# Altium PCB layout.PcbDoc
Units mm, origin at the board's own origin, x right, y up, seen from the top; angles counter-clockwise.
Board outline 78.98 x 56.03 mm, 2 copper layers (Top Layer, Bottom Layer); 74 components, 75 nets, 270 pads, 38 vias.
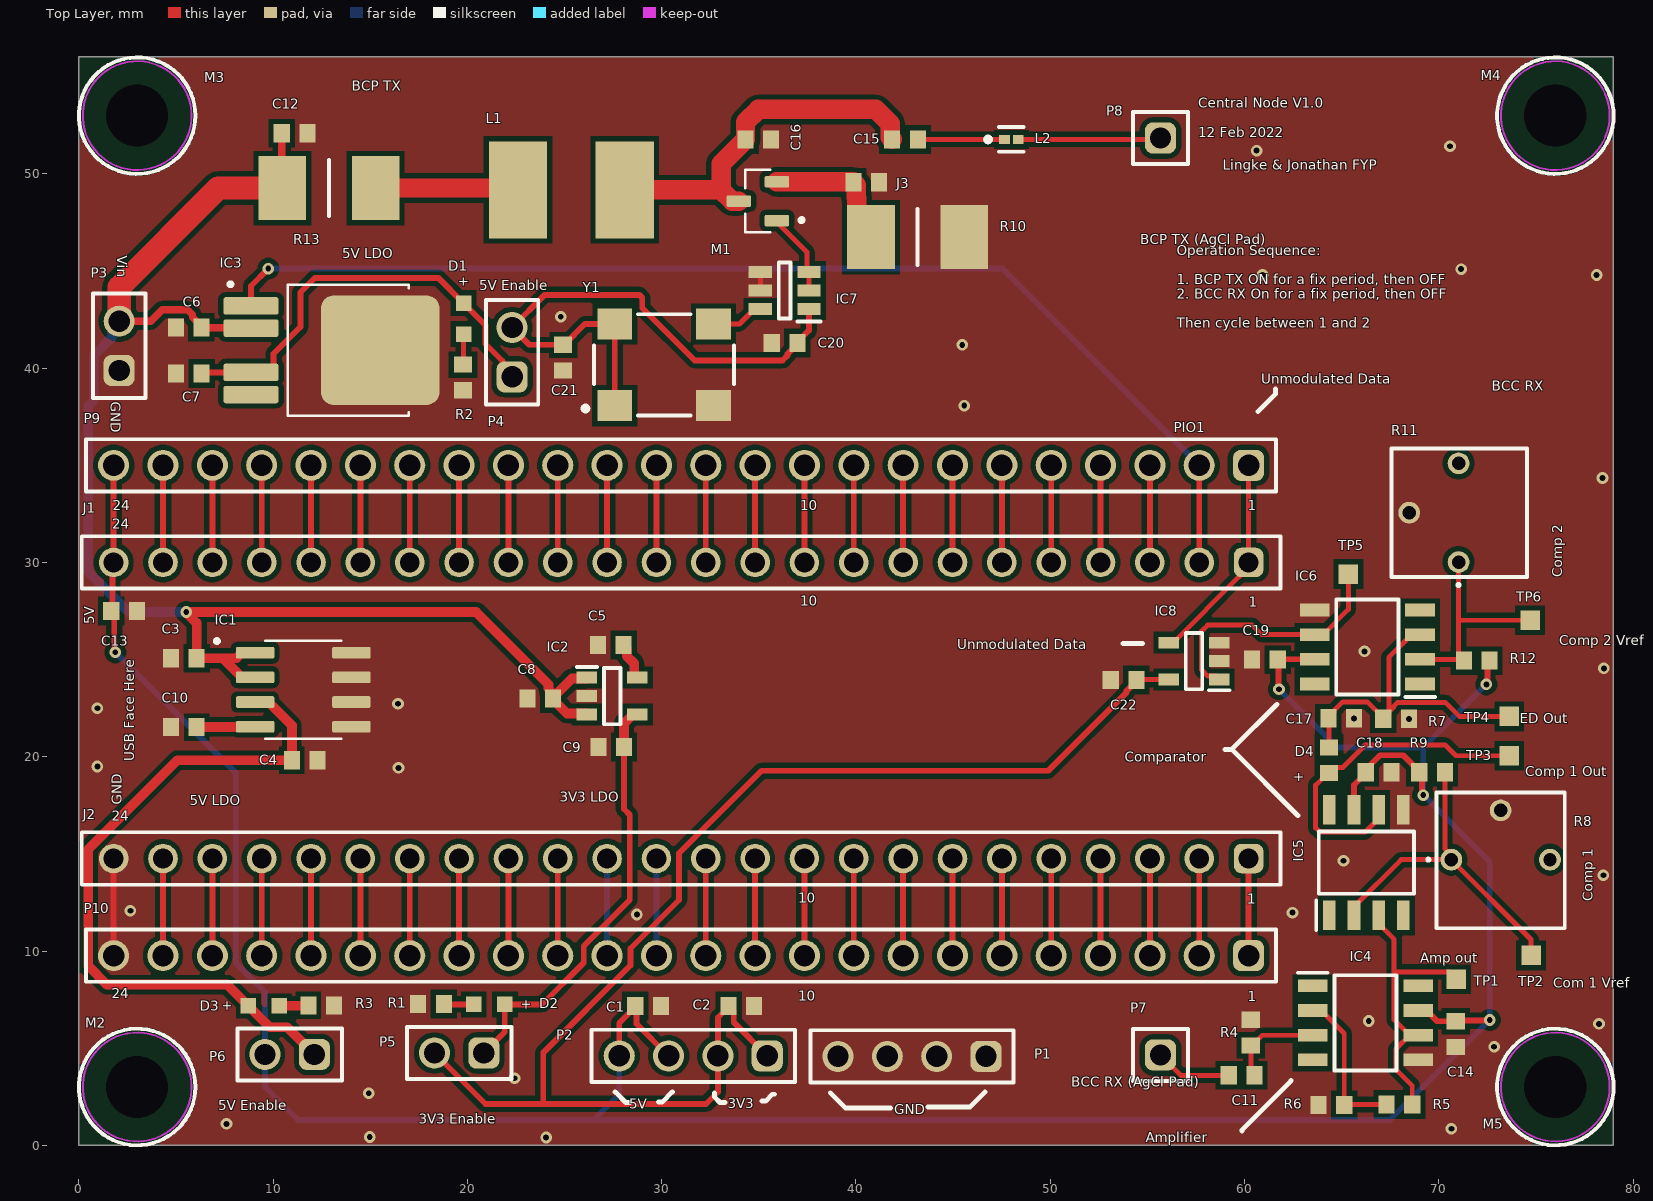
[diagram p0: Top Layer view]
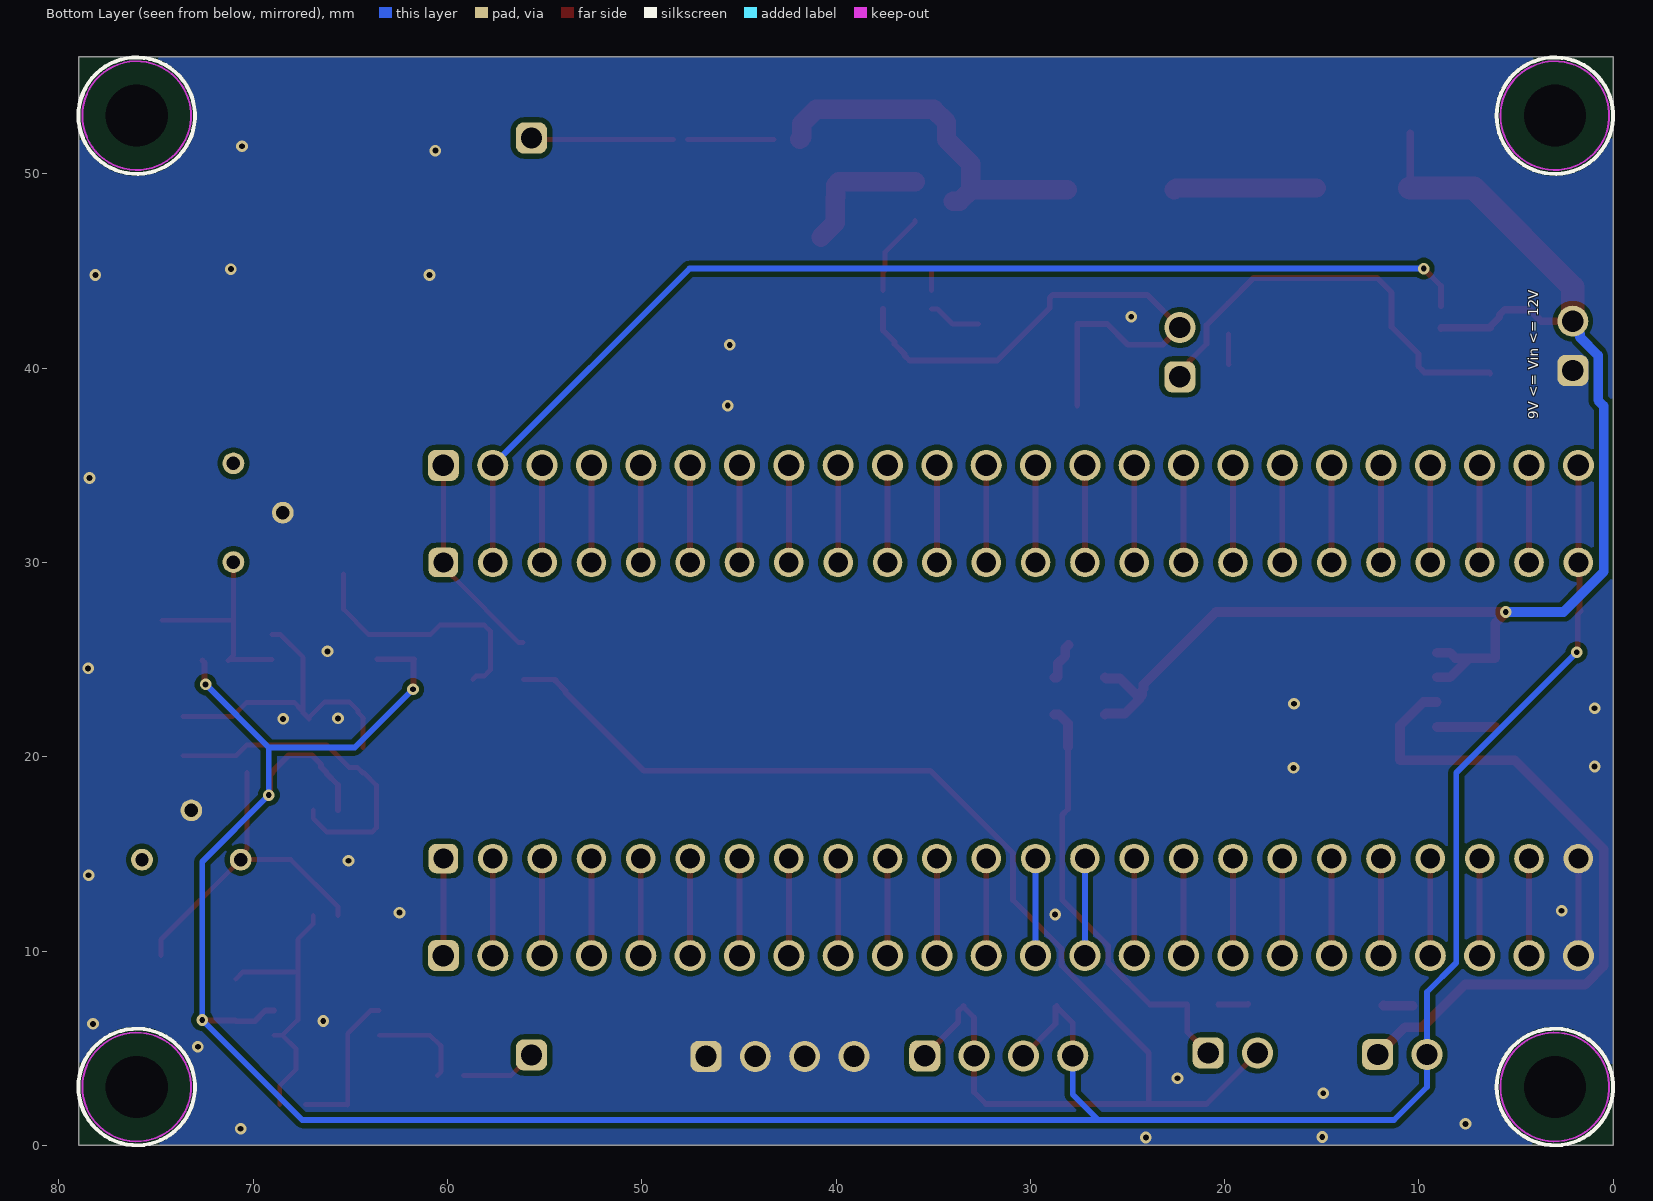
[diagram p1: Bottom Layer view, seen from below]
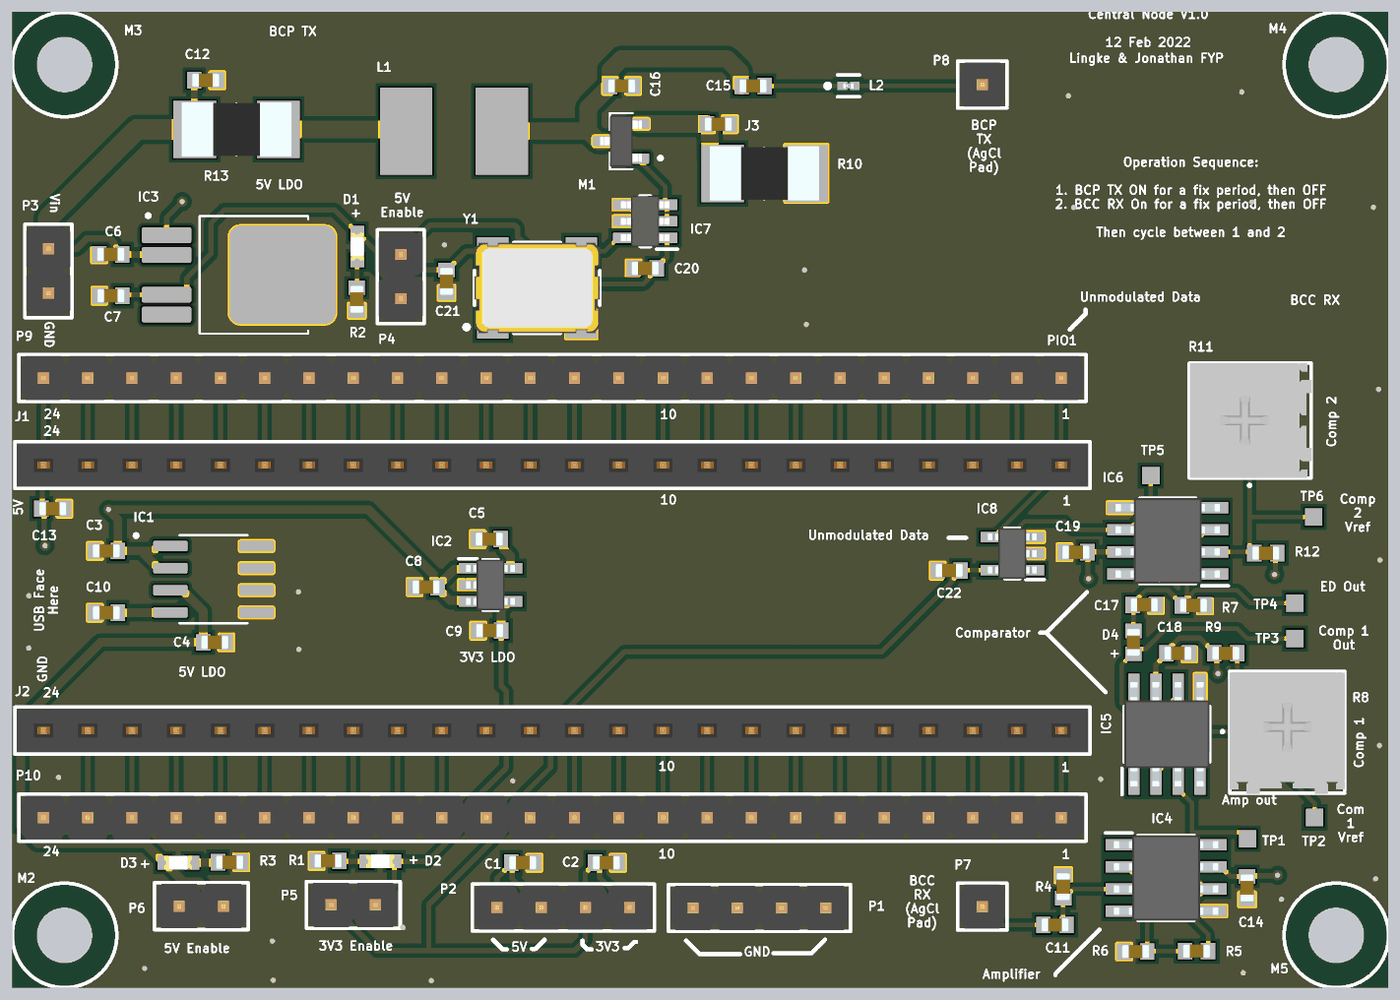
[diagram p2: 3D render of the assembled board from above, using the file's embedded part models]

## Layer stack, top to bottom
Top Solder: solder mask 0.0102, Solder Resist, Dk 3.5
Top Layer: signal copper 0.0356
Dielectric 1: dielectric 0.32, FR-4, Dk 4.8
Bottom Layer: signal copper 0.0356
Bottom Solder: solder mask 0.0102, Solder Resist, Dk 3.5

## Board outline
0,56.025 78.975,56.025 78.975,0 0,0

## Design rules (kind name [scope] priority, off if disabled: settings)
Clearance [All] p1: gap=0.254 ignorepadtopadclearanceinfootprint=TRUE
HoleSize [All] p1: absolutevalues=TRUE maxlimit=10 minlimit=0.025 maxpercent=80.000 minpercent=20.000
HoleToHoleClearance [All] p1: gap=0.1 allowstackedmicrovias=TRUE
MinimumSolderMaskSliver [All] p1: minsoldermaskwidth=0.1
PlaneConnect [All] p1: planeconnectstyle=Direct reliefexpansion=0.508 reliefentries=4 reliefconductorwidth=0.254 reliefairgap=0.254
PolygonConnect [All] p1: connectstyle=Direct reliefconductorwidth=0.254 reliefentries=4 polygonreliefangle="90 Angle" airgapwidth=0.254
RoutingVias [All] p1: holewidth=0.711 width=1.27 viastyle="Through Hole" minholewidth=0.3 minwidth=0.6 maxholewidth=0.711 maxwidth=1.27
SilkToSilkClearance [All] p1: silktosilkclearance=0.1
SilkToSolderMaskClearance [IsPad] p1: minsilkscreentomaskgap=0.1 clearancetoexposedcopper=TRUE
SolderMaskExpansion [All] p1: expansion=0.102 istentingtop=FALSE
Width Width_1 [InNet('Vin')] p1: maxlimit=5 minlimit=0.254 preferedwidth=0.5
Width [All] p2: maxlimit=10 minlimit=0.254 preferedwidth=0.254
24 further rules are at their usual default settings.

## Components (designator, comment, footprint, x,y, rotation, side; value= is the part's Value field where it differs from the comment)
C1 "0.1uF" 0603 29.3,7.175 r0 top
C2 "0.1uF" 0603 34.1,7.175 r0 top
C3 "0.33uF" 0603 5.4,25.075 r180 top
C4 "10uF" 0603 11.625,19.825 r0 top
C5 "10nF" 0603 27.375,25.749 r180 top
C6 "0.33uF" 0603 5.65,42.1 r0 top
C7 "10uF" 0603 5.661,39.725 r0 top
C8 "0.33uF" 0603 23.75,23 r180 top
C9 "10uF" 0603 27.4,20.501 r180 top
C10 "10nF" 0603 5.4,21.525 r180 top
C11 "33pF" 0603 59.85,3.6 r0 top
C12 "10uF" 0603 11.1,52.1 r0 top
C13 "0.1uF" 0603 2.325,27.5 r180 top
C14 "0.1uF" 0603 70.874,5.725 r90 top
C15 "91pF" 0603 42.525,51.775 r0 top
C16 "4.7pF" 0603 34.975,51.775 r0 top
C17 "50pF" 0603 64.975,21.975 r180 top
C18 "0.1uF" 0603 66.9,19.199 r180 top
C19 "0.1uF" 0603 61.05,25 r0 top
C20 "10uF" 0603 36.325,41.3 r180 top
C21 "0.1uF" 0603 24.925,40.55 r270 top
C22 "0.1uF" 0603 53.775,23.95 r0 top
D1 "Super Red, 1.9V" WL-SMCW_0603_H=0.7mm 19.8,42.55 r90 top
D2 "Super Red, 1.9V" WL-SMCW_0603_H=0.7mm 21.125,7.25 r0 top
D3 "Super Red, 1.9V" WL-SMCW_0603_H=0.7mm 9.525,7.175 r180 top
D4 "Diode" 0603 64.35,19.825 r90 top
IC1 "LDO 5V" SOIC-8 11.55,23.45 r0 top
IC2 "LDO 3V3" SOT-23-5 27.45,23.125 r0 top
IC3 "LD29150PT50R" PPAK 13,40.925 r270 top
IC4 "LTC6268IS8#PBF" SOIC127P599X175-8N 66.225,6.3 r0 top
IC5 "LTC6268IS8#PBF" SOIC127P599X175-8N 66.275,14.55 r90 top
IC6 "LTC6268IS8#PBF" SOIC127P599X175-8N 66.325,25.651 r180 top
IC7 "LM5114B" SOT-23-6 36.329,44 r180 top
IC8 "SN74LV1T32DBVRG4" SOT-23-5 57.4,24.925 r180 top
J1 "61302411821" 61302411821 31,30 r180 top
J2 "61302411821" 61302411821 31,14.76 r180 top
J3 "Jumper" 0603 40.525,49.575 r180 top
L1 "TPI078060L047N" TPI078060L047N 28.1,49.175 r180 top
L2 "LQP03TN75NH02D" FP-LQP03PN_02-IPC_A 48,51.775 r0 top
M1 "IRLML0040TRPBF" SOT-23 34.95,48.599 r270 top
M2 "M3 Mounting Hole" "M3 Hole" 3,3 r0 top
M3 "M3 Mounting Hole" "M3 Hole" 3,53 r0 top
M4 "M3 Mounting Hole" "M3 Hole" 76,53 r0 top
M5 "M3 Mounting Hole" "M3 Hole" 76,3 r0 top
P1 "61300411121" 61300411121 42.885,4.575 r180 top
P2 "61300411121" 61300411121 31.625,4.6 r180 top
P3 "61300211121" 61300211121 2.075,41.15 r90 top
P4 "61300211121" 61300211121 22.299,40.825 r90 top
P5 "61300211121" 61300211121 19.575,4.751 r180 top
P6 "61300211121" 61300211121 10.85,4.676 r180 top
P7 "61300111121" 61300111121 55.675,4.65 r0 top
P8 "61300111121" 61300111121 55.675,51.85 r0 top
P9 "61302411121" 61302411121 31,35 r180 top
P10 "61302411121" 61302411121 31,9.76 r180 top
R1 "1K Ohm" 0603 18.125,7.275 r0 top
R2 "1K Ohm" 0603 19.775,39.525 r90 top
R3 "1K Ohm" 0603 12.475,7.2 r180 top
R4 "33K Ohm" 0603 60.325,5.8 r270 top
R5 "100k Ohm" 0603 67.975,2.1 r180 top
R6 "1k Ohm" 0603 64.475,2.075 r0 top
R7 "25K Ohm" 0603 67.8,21.95 r180 top
R8 "3362P-1-303LF" 3362P_1 73.185,11.17 r0 top
R9 "10k Ohm" 0603 69.654,19.199 r0 top
R10 "Resistor_2512" 2512 43.175,46.75 r180 top
R11 "3362P-1-303LF" 3362P_1 74.55,32.562 r90 top
R12 "10k Ohm" 0603 71.95,24.95 r0 top
R13 "10 Ohm" 2512 12.875,49.275 r180 top
TP1 "TP" "Test Point" 70.9,8.55 r0 top
TP2 "TP" "Test Point" 74.75,9.775 r0 top
TP3 "TP" "Test Point" 73.625,20.05 r0 top
TP4 "TP" "Test Point" 73.625,22.075 r0 top
TP5 "TP" "Test Point" 65.35,29.4 r0 top
TP6 "TP" "Test Point" 74.7,27.025 r0 top
Y1 "40MHz, 5V" WE-SPXO_CFPS-72 30.124,40.175 r0 top

## Footprints (in the part's own frame and the unit in brackets; to place one, negate y for a bottom-side part, rotate by r counter-clockwise, add the part's x,y. Pads: shape width x height; smd on the part's side, far side on the other; paste and mask are expansions set on the pad)
0603 [mm]
  rect 0.83x0.94 smd: 1(-0.66,0) 2(0.66,0)
  body extent -0.8,-0.4 0.8,0.4, height 0.9
2512 [mm]
  rect 2.45x3.3 smd: 1(-2.4,0) 2(2.4,0)
  silkscreen extent 0,-1.45 0,1.45, body extent -3.15,-1.55 3.15,1.55, height 0.8
3362P_1 [mm]
  round 1.12 hole 0.69: 1(-2.54,3.53) 2(0,6.07) 3(2.54,3.53)
  silkscreen extent -3.78,0 3.3,6.99, body extent -3.3,-0.04 3.3,6.95, height 4.75
61300111121 [mm] "Pin Header, pitch 2.54 mm, THT, Vertical, single row, 1p"
  rrect50% 1.6x1.6 hole 1.1: 1(0,0)
  silkscreen extent -1.42,-1.35 1.42,1.35, body extent -1.27,-1.27 1.27,1.27, height 8.57
61300211121 [mm] "Pin Header, pitch 2.54 mm, THT, Vertical, single row, 2p"
  rrect50% 1.6x1.6 hole 1.1: 1(-1.27,0)
  round 1.6 hole 1.1: 2(1.27,0)
  silkscreen extent -2.69,-1.35 2.69,1.35, body extent -2.54,-1.27 2.54,1.27, height 8.57
61300411121 [mm] "Pin Header, pitch 2.54 mm, THT, Vertical, single row, 4p"
  rrect50% 1.6x1.6 hole 1.1: 1(-3.81,0)
  round 1.6 hole 1.1: 2(-1.27,0) 3(1.27,0) 4(3.81,0)
  silkscreen extent -5.23,-1.35 5.23,1.35, body extent -5.08,-1.27 5.08,1.27, height 8.57
61302411121 [mm] "Pin Header, pitch 2.54 mm, THT, Vertical, single row, 24p"
  rrect50% 1.6x1.6 hole 1.1: 1(-29.21,0)
  round 1.6 hole 1.1: 2(-26.67,0) 3(-24.13,0) 4(-21.59,0) 5(-19.05,0) 6(-16.51,0) 7(-13.97,0) 8(-11.43,0) 9(-8.89,0) 10(-6.35,0) 11(-3.81,0) 12(-1.27,0) 13(1.27,0) 14(3.81,0) 15(6.35,0) 16(8.89,0) 17(11.43,0) 18(13.97,0) 19(16.51,0) 20(19.05,0) 21(21.59,0) 22(24.13,0) 23(26.67,0) 24(29.21,0)
  silkscreen extent -30.63,-1.35 30.63,1.35, body extent -30.48,-1.27 30.48,1.27, height 8.57
61302411821 [mm] "Socket Header, Pitch 2.54 mm, THT, Vertical, single row, 24p"
  rrect50% 1.52x1.52 hole 1.02: 1(-29.21,0)
  round 1.52 hole 1.02: 2(-26.67,0) 3(-24.13,0) 4(-21.59,0) 5(-19.05,0) 6(-16.51,0) 7(-13.97,0) 8(-11.43,0) 9(-8.89,0) 10(-6.35,0) 11(-3.81,0) 12(-1.27,0) 13(1.27,0) 14(3.81,0) 15(6.35,0) 16(8.89,0) 17(11.43,0) 18(13.97,0) 19(16.51,0) 20(19.05,0) 21(21.59,0) 22(24.13,0) 23(26.67,0) 24(29.21,0)
  silkscreen extent -30.86,-1.35 30.86,1.35, body extent -30.73,-1.25 30.73,1.25, height 8.55
FP-LQP03PN_02-IPC_A [mm]
  rect 0.554x0.463 smd paste+0 mask+0: 1(-0.354,0) 2(0.354,0)
  silkscreen extent -1.32,-0.63 0.63,0.63, body extent -0.83,-0.43 0.83,0.43, height 0.25
"M3 Hole" [mm]
  round 0 hole 3.2 unplated mask+0.1: 1(0,0)
  Keep-Out Layer circle w0.1: c0,0 r2.8
  silkscreen extent -3,-3 3,3
PPAK [mm]
  rrect23% 0.9x2.83 smd mask+0.13: 1(-2.28,-4.14) 2(-1.14,-4.14) 4(1.14,-4.14) 5(2.28,-4.14)
  rrect23% 5.63x6.1 smd: 6(0,2.51)
  silkscreen extent -3.5,-5.3 3.37,3.98
SOIC127P599X175-8N [mm]
  rect 1.526x0.65 smd: 1(-2.712,1.905) 2(-2.712,0.635) 3(-2.712,-0.635) 4(-2.712,-1.905) 5(2.712,-1.905) 6(2.712,-0.635) 7(2.712,0.635) 8(2.712,1.905)
  silkscreen extent -3.47,-2.45 1.6,2.58, body extent -3,-2.45 3,2.45, height 1.75
SOIC-8 [mm]
  rrect25% 1.97x0.6 smd: 1(-2.475,1.905) 2(-2.475,0.635) 3(-2.475,-0.635) 4(-2.475,-1.905) 5(2.475,-1.905) 6(2.475,-0.635) 7(2.475,0.635) 8(2.475,1.905)
  silkscreen extent -4.54,-2.52 1.95,2.6
SOT-23 [mm]
  rrect25% 0.59x1.26 smd: 1(1,0.98) 2(-1,0.98) 3(0,-0.98)
  silkscreen extent -1.61,-0.65 1.61,2.35, body extent -1.46,-1.2 1.46,1.2, height 1.2
SOT-23-5 [mm]
  rect 1.05x0.6 smd: 1(-1.3,0.95) 2(-1.3,0) 3(-1.3,-0.95) 4(1.3,-0.95) 5(1.3,0.95)
  silkscreen extent -1.83,-1.45 0.43,1.5, body extent -1.4,-1.45 1.4,1.45, height 1
SOT-23-6 [mm]
  rect 1.2x0.6 smd: 1(-1.25,0.95) 2(-1.25,0) 3(-1.25,-0.95) 4(1.25,-0.95) 5(1.25,0) 6(1.25,0.95)
  silkscreen extent -1.85,-1.45 0.3,1.6, body extent -1.4,-1.45 1.4,1.45, height 1.2
"Test Point" [mm]
  rect 1x1 smd: 1(0,0)
TPI078060L047N [mm]
  rect 3x5 smd: 1(0,0) 2(5.5,0)
WE-SPXO_CFPS-72 [mm] "Simple Packaged Quartz Oscillator, body 7.2x5.2mm"
  rect 1.8x1.6 smd: 1(-2.54,-2.1) 2(2.54,-2.1) 3(2.54,2.1) 4(-2.54,2.1)
  silkscreen extent -4.17,-2.6 3.6,2.6, body extent -3.6,-2.6 3.6,2.6, height 1.35
WL-SMCW_0603_H=0.7mm [mm] "SMD Mono-color Chip LED, body 1.6x0.8mm"
  rect 0.8x0.8 smd: 1(-0.8,0) 2(0.8,0)
  body extent -0.8,-0.4 0.8,0.4, height 0.7

## Part data
C1 C2 C3 C4 C5 C6 C7 C8 C9 C10 C11 C12 C13 C14 C15 C16 C17 C18 C19 C20 C21 C22: library part Capacitor_0603, "Capacitor"
D1 D2 D3: library part 150060SS75000, "WL-SMCW SMT Mono-color Chip LED Waterclear, size 0603, Super Red, 1.9V, 140deg", Emitting Color="Super Red", Forward Voltage typ.=1.9V, Operating Temperature="-40 to +85degC", Chip Technology=AlInGaP, ComponentLink1Description=Manufacturer, ComponentLink1URL=http://www.we-online.de, ComponentLink2Description=Datasheet, ComponentLink2URL=https://www.we-online.com/catalog/datasheet/150060SS75000.pdf, Dominant Wavelength typ.=630nm, Luminous Intensity typ.=60mcd, Mounting Technology=SMT, Packaging="Tape and Reel", Part Number=150060SS75000, Peak Wavelength typ.=645nm, Published Date="December 2019", Publisher="Wurth Elektronik", Size=0603, Viewing Angle=140deg
IC1: library part SPX3819S-L-5-0/TR
IC2: library part SPX3819M5-L-3-3/TR
IC3: "1.5A, Very-Low Drop Voltage Regulator, 5V, 5-Pin PPAK", ComponentLink1Description="Manufacturer URL", ComponentLink1URL=http://www.st.com, ComponentLink2Description=Datasheet, ComponentLink2URL=http://www.st.com/internet/com/TECHNICAL_RESOURCES/TECHNICAL_LITERATURE/DATASHEET/CD00003403.pdf, DatasheetVersion=27/10/2010, PackageDescription="5-Pin Transistor Outline Package 1.27 mm Pitch, 9.7 mm Lead Span", PackageReference=PPAK, PackageVersion=1/06/2004
IC4 IC5 IC6: "Integrated Circuit", Manufacturer_Name="Linear Technology", Mouser2 Part Number=584-LTC6268IS8#PBF, Datasheet Link=https://componentsearchengine.com//LTC6268IS8#PBF.pdf, Height=1.752mm, Manufacturer_Part_Number=LTC6268IS8#PBF, Mouser2 Price/Stock=https://www.mouser.com/Search/Refine.aspx?Keyword=584-LTC6268IS8%23PBF
IC8: Supplier Part Number 1=595-SN74LV1T32DBVRG4, Supplier 1=Mouser
J1 J2: "WR-PHD Socket Header, THT, pitch 2.54mm, Single Row, Vertical, 24p", Contact Resistance=20mOhm, Manufacturer="Wurth Elektronik", Operating Temperature="-40 to +125degC", Rated Current=3A, Withstanding Voltage=500VAC, Working Voltage=250VAC, ComponentLink1Description=Manufacturer, ComponentLink1URL=http://www.we-online.de, ComponentLink2Description=Datasheet, ComponentLink2URL=https://www.we-online.com/catalog/datasheet/61302411821.pdf, Gender="Socket Header", Manufacturer Part Number=61302411821, Mounting Technology=THT, Orientation=Vertical, Packaging=Tray, Pin Number=24, Pitch=2.54mm, Row Number=Single
J3: library part 0603_Jumper, "Capacitor"
L1: Supplier Part Number 1=399-TPI078060L047NCT-ND, Supplier 1=Digi-Key
L2: "Film type RF Inductor 75nH ±3% 100mA 10Ω 0201 (0603)", Case Code (Imperial)=0201, Case Code (Metric)=0603, Current Rating=100mA, DC Resistance (DCR)=10R, Inductance=75nH, Max Operating Temperature=125°C, Min Operating Temperature=-55°C, Package Quantity=15000, Resistor Type="Thin Film", Self Resonant Frequency=1GHz, Supplier Part Number 1=490-13018-1-ND, Test Frequency=300MHz, Tolerance=3%, Case/Package=0201, Core Material=Non-Magnetic, Height=0.3mm, Height - Seated (Max)=0.013inch, Length=0.024inch, Max DC Current=100mA, Mount="Surface Mount", Packaging="Tape and Reel", Q Factor=8, RoHS Compliant=Yes, Shielding=Unshielded, Supplier 1=Digi-Key, Termination=SMD/SMT, Weight=6E-06oz, Width=0.012inch
M1: "HEXFET(R) Power MOSFET, 40 V, -55 to 150 degC, 3-Pin SOT-23, RoHS, Tape and Reel", Manufacturer="International Rectifier", Maximum Continuous Drain Current=3.6A, Maximum Drain Source Resistance=0.056Ω, Maximum Drain Source Voltage=40V, Maximum Gate Source Voltage=±16V, Maximum Gate Threshold Voltage=2.5V, Maximum Operating Temperature=+150°C, Maximum Power Dissipation=1.3W, Minimum Gate Threshold Voltage=1V, Minimum Operating Temperature=-55°C, Package Description="3-Pin Small Outline Transistor, Body 2.92 x 1.3 mm, Pitch 0.95 mm", Package Reference=SOT-23, Typical Input Capacitance @ Vds=266pF@25V, Category=PowerMOSFET, Channel Mode=Enhancement, Channel Type=N, Datasheet URL=https://datasheet.ciiva.com/22709/irlml0040pbf-22709201.pdf, Datasheet Version=02/2012, Dimensions=3.04x1.4x1.02mm, Height=1.02mm, Length=3.04mm, Manufacturer URL=http://internationalrectifier.com/, Mounting Technology=SurfaceMount, Mounting Type=SurfaceMount, Number of Elements per Chip=1, Package Type=SOT-23, Pin Count=3, Transistor Configuration=Single, Transistor Material=Si, Typical Gate Charge @ Vgs=2.6nC@4.5V, Typical Turn-Off Delay Time=6.4ns, Typical Turn-On Delay Time=5.1ns, Width=1.4mm
M2 M3 M4 M5: library part M3_Mounting_hole
P1 P2: "WR-PHD Pin Header, THT, pitch 2.54mm, Single Row, Vertical, 4p", Contact Resistance=20mOhm, Manufacturer="Wurth Elektronik", Operating Temperature="-40 to +105degC", Rated Current=3A, Withstanding Voltage=500VAC, Working Voltage=250VAC, ComponentLink1Description=Manufacturer, ComponentLink1URL=http://www.we-online.de, ComponentLink2Description=Datasheet, ComponentLink2URL=https://www.we-online.com/catalog/datasheet/61300411121.pdf, Gender="Pin Header", Manufacturer Part Number=61300411121, Mounting Technology=THT, Orientation=Vertical, Packaging=Bag, Pin Number=4, Pitch=2.54mm, Row Number=Single
P3 P4 P5 P6: "WR-PHD Pin Header, THT, pitch 2.54mm, Single Row, Vertical, 2p", Contact Resistance=20mOhm, Manufacturer="Wurth Elektronik", Operating Temperature="-40 to +105degC", Rated Current=3A, Withstanding Voltage=500VAC, Working Voltage=250VAC, ComponentLink1Description=Manufacturer, ComponentLink1URL=http://www.we-online.de, ComponentLink2Description=Datasheet, ComponentLink2URL=https://www.we-online.com/catalog/datasheet/61300211121.pdf, Gender="Pin Header", Manufacturer Part Number=61300211121, Mounting Technology=THT, Orientation=Vertical, Packaging=Bag, Pin Number=2, Pitch=2.54mm, Row Number=Single
P7 P8: "WR-PHD Pin Header, THT, pitch 2.54mm, Single Row, Vertical, 1p", Contact Resistance=20mOhm, Manufacturer="Wurth Elektronik", Operating Temperature="-40 to +105degC", Rated Current=3A, Withstanding Voltage=500VAC, Working Voltage=250VAC, ComponentLink1Description=Manufacturer, ComponentLink1URL=http://www.we-online.de, ComponentLink2Description=Datasheet, ComponentLink2URL=https://www.we-online.com/catalog/datasheet/61300111121.pdf, Gender="Pin Header", Manufacturer Part Number=61300111121, Mounting Technology=THT, Orientation=Vertical, Packaging=Bag, Pin Number=1, Pitch=2.54mm, Row Number=Single
P9 P10: "WR-PHD Pin Header, THT, pitch 2.54mm, Single Row, Vertical, 24p", Contact Resistance=20mOhm, Manufacturer="Wurth Elektronik", Operating Temperature="-40 to +105degC", Rated Current=3A, Withstanding Voltage=500VAC, Working Voltage=250VAC, ComponentLink1Description=Manufacturer, ComponentLink1URL=http://www.we-online.de, ComponentLink2Description=Datasheet, ComponentLink2URL=https://www.we-online.com/catalog/datasheet/61302411121.pdf, Gender="Pin Header", Manufacturer Part Number=61302411121, Mounting Technology=THT, Orientation=Vertical, Packaging=Bag, Pin Number=24, Pitch=2.54mm, Row Number=Single
R1 R2 R3 R4 R5 R6 R7 R9 R12: library part Resistor, "Resistor"
R8 R11: "Resistor", Manufacturer_Name=Bourns, Manufacturer_Part_Number=3362P-1-303LF
R10: "Resistor"
R13: library part Resistor_2512, "Resistor"
TP1 TP2 TP3 TP4 TP5 TP6: library part "Test Point", "Test Point 1mm by 1mm"
Y1: library part 831018739, "WE-SPXO Simple Packaged Quartz Oscillator, SMT, CFPS-72, 40MHz, 5V", Frequency=40MHz, Frequency Stability=+/-50ppm, Manufacturer="Wurth Elektronik", Operating Temperature="0 to +70degC", Supply Voltage=5V, ComponentLink1Description=Manufacturer, ComponentLink1URL=http://www.we-online.de, ComponentLink2Description=Datasheet, ComponentLink2URL=https://katalog.we-online.com/pbs/datasheet/831018739.pdf, Manufacturer Part Number=831018739, Mounting Technology=SMT, Packaging="Tape and Reel", Published Date="July 2020", Size=CFPS-72

## Via types
v1: diameter 0.6, hole 0.3, Top Layer to Bottom Layer, 38 vias

## Nets (pads, with @x,y where several pads share a name; then routed paths per layer and width w, separated by ;. In a path a pad name is that pad's centre, name@x,y a point inside that pad or via, vN(x,y) a via of type N, cw(c..) or ccw(c..) an arc to the next point about the centre after c; other vN are vias at no path point)
"AFE Output": IC6.6 IC8.1 TP5.1 | length 13.3
  Top Layer w0.254: IC8.1 58.527,24.148 58.113,24.148 57.794,24.467 57.794,26.469 58.1,26.775 60.393,26.775 60.882,26.286 IC6.6 64.051,26.286 65.35,27.585 TP5.1
Amp_out: IC4.6 IC5.3 R5.1 TP1.1 | length 14.8
  Top Layer w0.254: IC5.3 66.91,11.4 67.705,10.605 67.705,8.925 ; R5.1 68.635,3.07 67.793,3.912 67.793,4.959 IC4.6@68.499,5.665 ; IC4.6 IC4.6@68.499,5.665 ; TP1.1 70.527,8.923 67.707,8.923 67.705,8.925 ; 67.705,8.925 67.705,6.459 IC4.6@68.499,5.665
"BCC RX 3V3": C2.1 C22.2 IC8.5 P2.1 P2.2 P5.2 | length 68.8
  Top Layer w0.254: C22.2 54.46,23.975 IC8.5
  Top Layer w0.3: P5.2 20.931,2.125 23.9,2.125 ; P2.1 33.705,6.33 33.705,6.91 C2.1 33.44,7.12 32.895,6.575 P2.2 32.895,2.745 32.275,2.125 23.9,2.125 ; C22.2 54.435,23.895 53.934,23.394 53.934,23.313 49.899,19.277 35.141,19.277 30.894,15.03 30.894,12.627 28.394,10.127 28.394,9.261 23.9,4.767 23.9,2.125
"BCC RX 5V": C1.1 C13.2 C14.2 C18.2 C19.2 IC4.7 IC5.7 IC6.7 J1.24 P2.3 P2.4 P6.2 P9.24 R9.1 R12.2 | length 155.7
  Top Layer w0.3: P9.24 J1.24 1.727,29.938 1.727,27.563 C13.2 1.818,27.347 1.818,25.432 v1(1.875,25.375) ; P2.4 27.815,6.295 28.64,7.12 C1.1 28.7,7.115 28.7,6.255 P2.3 ; v1(61.775,23.475) 61.743,23.507 61.743,24.968 C19.2 61.726,25.016 IC6.7 ; IC5.7 65.64,18.544 66.24,19.144 C18.2 66.505,19.464 66.505,19.601 66.978,20.073 68.175,20.073 68.994,19.254 R9.1 69.143,19.051 69.143,18.082 v1(69.2,18.025) ; IC4.7 69.375,6.935 69.925,6.385 C14.2 70.907,6.418 72.593,6.418 v1(72.625,6.45) ; v1(72.45,23.725) 72.507,23.782 72.507,24.847 R12.2
  Bottom Layer w0.3: v1(1.875,25.375) 8.074,19.176 8.074,9.393 9.58,7.887 P6.2 9.58,2.995 11.275,1.3 26.5,1.3 ; P2.4 27.815,2.615 26.5,1.3 ; v1(61.775,23.475) 64.775,20.475 69.2,20.475 ; v1(72.45,23.725) 69.2,20.475 ; 26.5,1.3 67.475,1.3 v1(72.625,6.45) 72.625,14.6 v1(69.2,18.025) 69.2,20.475
"BCP TX 5V": C20.1 C21.1 IC7.1 P4.2 Y1.1 Y1.4 | length 29.8
  Top Layer w0.3: Y1.1 Y1.4 26.045,42.275 24.98,41.21 C21.1 23.184,41.21 P4.2 23.979,43.775 28.851,43.775 29,43.626 29,43.099 31.699,40.4 36.221,40.4 36.484,40.663 36.484,40.744 36.985,41.245 36.985,41.355 37.579,41.949 IC7.1
"BCP TX Vout": L2.2 P8.1 | length 7.4
  Top Layer w0.254: L2.2 55.6,51.775 P8.1
"Comparator 1 out": D4.1 IC5.6 TP3.1 | length 17.3
  Top Layer w0.254: IC5.6 66.91,16.824 66.204,16.118 63.887,16.118 63.664,16.341 63.664,18.534 64.295,19.165 D4.1 64.638,19.453 65.07,19.453 66.221,20.604 70.333,20.604 70.887,20.05 TP3.1
"Comparator 1 Vref": IC5.2 R8.1 R9.2 TP2.1 | length 17.7
  Top Layer w0.254: IC5.2 65.64,12.276 68.064,14.7 R8.1 ; R9.2 70.314,15.265 70.645,14.934 R8.1 ; TP2.1 74.75,10.595 R8.1
"Comparator 2 Vref": IC6.2 R11.1 R12.1 TP6.1 | length 11.1
  Top Layer w0.254: IC6.2 R12.1@71.224,25.016 ; R11.1 71.02,27.075 ; R12.1 R12.1@71.224,25.016 ; TP6.1 71.07,27.025 71.02,27.075 ; 71.02,27.075 71.02,25.22 R12.1@71.224,25.016
"ED Out": C17.2 D4.2 IC6.3 R7.2 TP4.1 | length 17.7
  Top Layer w0.254: D4.2 64.35,21.94 C17.2 64.603,22.263 64.603,22.367 65.062,22.826 66.319,22.826 R7.2@67.14,22.005 ; IC6.3 68.599,26.286 67.428,25.115 67.428,22.238 R7.2 ; TP4.1 71.058,22.075 70.332,22.801 67.887,22.801 67.664,22.578 67.664,22.529 R7.2@67.14,22.005 ; R7.2 R7.2@67.14,22.005 ; R7.2 R7.2@67.14,22.005
FPGA_Enable: IC3.1 J1.2 P9.2 | length 59.4
  Top Layer w0.3: IC3.1 8.86,44.235 v1(9.75,45.125) ; J1.2 P9.2
  Bottom Layer w0.3: v1(9.75,45.125) 47.545,45.125 P9.2
GND: C1.2 C2.2 C3.2 C4.2 C5.2 C6.1 C7.1 C8.2 C9.2 C10.2 C12.2 C13.1 C14.1 C16.2 C17.1 C18.1 C19.1 C20.2 C21.2 C22.1 IC1.5 IC1.6 IC1.7 IC1.8 IC2.2 IC3.6 IC4.5 IC5.5 IC6.5 IC7.4 IC7.5 IC8.2 IC8.3 J2.24 J3.1 P1.1 P1.2 P1.3 P1.4 P3.1 P10.24 R1.1 R2.1 R3.1 R4.1 R6.1 R7.1 R8.2 R10.1 R11.2 Y1.2 | length 6
  Top Layer w0.254: IC7.5 IC7.4
  Top Layer w0.3: P10.24 J2.24
  other v1: 24.05,0.4 14.975,0.425 70.65,0.85 7.6,1.1 14.925,2.675 22.425,3.45 72.85,5.075 78.25,6.25 66.4,6.4 28.725,11.875 62.475,11.975 2.65,12.075 78.475,13.9 65.1,14.65 16.45,19.425 0.95,19.5 68.46,21.95 65.635,21.975 0.95,22.5 16.425,22.725 78.5,24.55 66.175,25.425 78.425,34.35 45.575,38.075 45.475,41.2 24.8,42.65 60.925,44.8 78.125,44.8 71.15,45.1 60.625,51.2 70.575,51.425
NetC4_1: C4.1 D3.2 IC1.3 P6.1 | length 36.1
  Top Layer w0.5: IC1.3 9.76,22.815 10.965,21.61 C4.1 5.067,19.825 0.486,15.244 0.486,9.22 1.433,8.272 7.628,8.272 D3.2 9.821,6.079 10.717,6.079 P6.1
NetC5_1: C5.1 IC2.5 | length 2
  Top Layer w0.5: C5.1 28.2,25.584 28.2,25.186 28.587,24.798 28.587,24.125 28.637,24.075 IC2.5
NetC7_2: C7.2 D1.2 IC3.4 P4.1 | length 22.3
  Top Layer w0.3: C7.2 6.381,39.785 IC3.4 9.722,39.785 10.022,40.085 10.022,40.747 11.4,42.125 11.4,43.9 12.15,44.65 18.5,44.65 D1.2 20.934,42.216 20.934,41.241 21.804,40.371 21.804,40.051 P4.1
NetC9_1: C9.1 D2.2 IC2.4 P5.1 | length 22.2
  Top Layer w0.3: P5.1 21.925,5.831 D2.2 23.843,7.25 25.986,9.393 25.986,10.259 28.354,12.627 28.354,17.012 28.06,17.306 C9.1
  Top Layer w0.5: C9.1 28.06,21.71 28.525,22.175 IC2.4
NetC10_1: C10.1 IC1.4 | length 3
  Top Layer w0.5: C10.1 6.07,21.535 9.065,21.535 IC1.4
NetC11_1: C11.1 P7.1 | length 3.9
  Top Layer w0.254: P7.1 56.725,3.6 C11.1
NetC11_2: C11.2 IC4.3 R4.2 | length 5
  Top Layer w0.254: C11.2 60.325,3.785 R4.2 60.38,5.14 60.905,5.665 IC4.3
NetC15_1: C15.1 C16.1 L1.1 M1.3 | length 19
  Top Layer w1: L1.1 33.059,49.175 ; M1.3 33.635,48.599 33.059,49.175 ; C15.1 41.757,51.883 41.757,52.593 41.025,53.325 34.975,53.325 34.315,52.665 C16.1 33.059,50.519 33.059,49.175
NetC15_2: C15.2 L2.1 | length 4.5
  Top Layer w0.254: C15.2 L2.1
NetD1_1: D1.1 R2.2 | length 1.6
  Top Layer w0.254: R2.2 19.8,40.21 D1.1
NetD2_1: D2.1 R1.2 | length 1.6
  Top Layer w0.3: R1.2 18.81,7.25 D2.1
NetD3_1: D3.1 R3.2 | length 1.5
  Top Layer w0.5: D3.1 10.338,7.187 11.802,7.187 R3.2
NetIC4_2: IC4.2 R5.2 R6.2 | length 8
  Top Layer w0.254: IC4.2 63.951,6.935 65.135,5.751 R6.2 65.16,2.1 R5.2
NetIC7_2: IC7.2 IC7.3 M1.1 | length 4.3
  Top Layer w0.254: M1.1 35.93,47.524 37.479,45.976 37.479,45.05 IC7.3 IC7.2
NetIC7_6: IC7.6 Y1.3 | length 2.7
  Top Layer w0.254: Y1.3 34.004,42.275 34.779,43.05 IC7.6
NetJ1_3: J1.3 P9.3 | length 5
  Top Layer w0.3: J1.3 P9.3
NetJ1_4: J1.4 P9.4 | length 5
  Top Layer w0.3: J1.4 P9.4
NetJ1_5: J1.5 P9.5 | length 5
  Top Layer w0.3: J1.5 P9.5
NetJ1_6: J1.6 P9.6 | length 5
  Top Layer w0.3: J1.6 P9.6
NetJ1_7: J1.7 P9.7 | length 5
  Top Layer w0.3: J1.7 P9.7
NetJ1_8: J1.8 P9.8 | length 5
  Top Layer w0.3: J1.8 P9.8
NetJ1_9: J1.9 P9.9 | length 5
  Top Layer w0.3: J1.9 P9.9
NetJ1_10: J1.10 P9.10 | length 5
  Top Layer w0.3: J1.10 P9.10
NetJ1_11: J1.11 P9.11 | length 5
  Top Layer w0.3: J1.11 P9.11
NetJ1_12: J1.12 P9.12 | length 5
  Top Layer w0.3: J1.12 P9.12
NetJ1_13: J1.13 P9.13 | length 5
  Top Layer w0.3: J1.13 P9.13
NetJ1_14: J1.14 P9.14 | length 5
  Top Layer w0.3: J1.14 P9.14
NetJ1_15: J1.15 P9.15 | length 5
  Top Layer w0.3: J1.15 P9.15
NetJ1_16: J1.16 P9.16 | length 5
  Top Layer w0.3: J1.16 P9.16
NetJ1_17: J1.17 P9.17 | length 5
  Top Layer w0.3: J1.17 P9.17
NetJ1_18: J1.18 P9.18 | length 5
  Top Layer w0.3: J1.18 P9.18
NetJ1_19: J1.19 P9.19 | length 5
  Top Layer w0.3: J1.19 P9.19
NetJ1_20: J1.20 P9.20 | length 5
  Top Layer w0.3: J1.20 P9.20
NetJ1_21: J1.21 P9.21 | length 5
  Top Layer w0.3: J1.21 P9.21
NetJ1_22: J1.22 P9.22 | length 5
  Top Layer w0.3: J1.22 P9.22
NetJ1_23: J1.23 P9.23 | length 5
  Top Layer w0.3: J1.23 P9.23
NetJ2_1: J2.1 P10.1 | length 5
  Top Layer w0.3: P10.1 J2.1
NetJ2_2: J2.2 P10.2 | length 5
  Top Layer w0.3: P10.2 J2.2
NetJ2_3: J2.3 P10.3 | length 5
  Top Layer w0.3: P10.3 J2.3
NetJ2_4: J2.4 P10.4 | length 5
  Top Layer w0.3: P10.4 J2.4
NetJ2_5: J2.5 P10.5 | length 5
  Top Layer w0.3: P10.5 J2.5
NetJ2_6: J2.6 P10.6 | length 5
  Top Layer w0.3: P10.6 J2.6
NetJ2_7: J2.7 P10.7 | length 5
  Top Layer w0.3: P10.7 J2.7
NetJ2_8: J2.8 P10.8 | length 5
  Top Layer w0.3: P10.8 J2.8
NetJ2_9: J2.9 P10.9 | length 5
  Top Layer w0.3: P10.9 J2.9
NetJ2_10: J2.10 P10.10 | length 5
  Top Layer w0.3: P10.10 J2.10
NetJ2_11: J2.11 P10.11 | length 5
  Top Layer w0.3: P10.11 J2.11
NetJ2_12: J2.12 P10.12 | length 5
  Top Layer w0.3: P10.12 J2.12
NetJ2_13: J2.13 P10.13 | length 5
  Bottom Layer w0.3: P10.13 J2.13
NetJ2_14: J2.14 P10.14 | length 5
  Bottom Layer w0.3: P10.14 J2.14
NetJ2_15: J2.15 P10.15 | length 5
  Top Layer w0.3: P10.15 J2.15
NetJ2_16: J2.16 P10.16 | length 5
  Top Layer w0.3: P10.16 J2.16
NetJ2_17: J2.17 P10.17 | length 5
  Top Layer w0.3: P10.17 J2.17
NetJ2_18: J2.18 P10.18 | length 5
  Top Layer w0.3: P10.18 J2.18
NetJ2_19: J2.19 P10.19 | length 5
  Top Layer w0.3: P10.19 J2.19
NetJ2_20: J2.20 P10.20 | length 5
  Top Layer w0.3: P10.20 J2.20
NetJ2_21: J2.21 P10.21 | length 5
  Top Layer w0.3: P10.21 J2.21
NetJ2_22: J2.22 P10.22 | length 5
  Top Layer w0.3: P10.22 J2.22
NetJ2_23: J2.23 P10.23 | length 5
  Top Layer w0.3: P10.23 J2.23
NetJ3_2: J3.2 M1.2 R10.2 | length 7.1
  Top Layer w1: M1.2 35.942,49.587 39.853,49.587 J3.2 40.016,49.424 40.016,48.793 40.05,48.759 40.05,47.475 R10.2
NetL1_2: L1.2 R13.1 | length 7.4
  Top Layer w1: R13.1 22.5,49.275 L1.2
PIO1: IC8.4 J1.1 P9.1 | length 11
  Top Layer w0.254: IC8.4 56.325,25.875 59.733,29.283 59.733,29.523 J1.1 P9.1
Vin: C3.1 C6.2 C8.1 C12.1 IC1.1 IC1.2 IC2.1 IC2.3 IC3.2 P3.2 R13.2 | length 75.2
  Top Layer w0.381: P3.2 3.7,42.42 4.294,43.015 5.589,43.015 5.85,42.754 5.85,42.616 6.31,42.155 C6.2 6.328,42.082 8.843,42.082 IC3.2 ; C12.1 10.44,49.31 R13.2
  Top Layer w0.5: IC1.2 8.39,24.085 7.55,24.925 7.55,25.075 ; IC1.1 8.39,25.355 8.11,25.075 7.55,25.075 ; IC2.3 26.1,22.225 25.13,22.225 24.41,22.945 C8.1 ; IC2.1 26.1,24.025 25.38,24.025 24.41,23.055 C8.1 ; 7.55,25.075 C3.1 6.06,26.888 5.525,27.423 v1(5.525,27.45) 20.448,27.45 24.175,23.723 24.175,23.513 24.245,23.443 24.245,23.165 C8.1
  Top Layer w1.2: P3.2 2.075,44.175 7.175,49.275 R13.2
  Bottom Layer w0.5: P3.2 2.075,42.122 1.71,41.757 1.71,41.593 0.771,40.654 0.771,38.346 0.486,38.061 0.486,29.516 2.552,27.45 v1(5.525,27.45)
pads on no net: IC3.5 IC4.1 IC4.4 IC4.8 IC5.1 IC5.4 IC5.8 IC6.1 IC6.4 IC6.8 M2.1 M3.1 M4.1 M5.1 R8.3 R11.3

## Polygon pours and split planes (outlines as drawn)
GND on Bottom Layer "GND_L02_P000" (solid, remove dead copper, pour order 0): 0,56.025 78.975,56.025 78.975,0 0,0
GND on Top Layer "GND_L01_P001" (solid, remove dead copper, pour order 1): 0,56.025 78.96,56.025 78.963,56.028 78.975,56.017 78.975,0 0,0

## Silkscreen, mask and mechanical layers (free items; w line width, h text height)
Top Overlay:
  lines w0.25: 27.6,2.75 28.15,2.2 28.25,2.2 28.375,2.2 ; 29.825,2.225 30.025,2.225 30.55,2.75 ; 32.725,2.7 32.725,2.475 33,2.2 33.25,2.2 ; 35.15,2.275 35.35,2.275 35.7,2.625 35.8,2.625 ; 38.675,2.7 39.45,1.925 41.775,1.925 ; 43.7,1.975 45.875,1.975 46.65,2.75 ; 53.75,25.825 54.75,25.825 ; 59,20.375 59.35,20.375 ; 59.875,0.725 59.875,0.8 62.4,3.325 ; 60.7,37.775 61.6,38.675 61.6,38.925 ; 61.675,22.7 59.35,20.375 ; 62.75,16.975 59.35,20.375 ; 59.35,20.375 59.35,20.375
  text "BCP TX" at 14.042,54.275 h0.5
  text "Central Node V1.0 /  / 12 Feb 2022" at 57.625,51.9 h0.5
  text "Lingke & Jonathan FYP" at 58.888,50.225 h0.5
  text "BCP TX (AgCl Pad)" at 54.634,46.375 h0.5
  text "Vin" at 1.975,45.791 h0.5 r270
  text "5V LDO" at 13.559,45.65 h0.5
  text "5V Enable" at 20.609,44.025 h0.5
  text "Operation Sequence: /  / 1. BCP TX ON for a fix period, then OFF / 2. BCC RX On for a fix period, then OFF /  / Then cycle between 1 and 2" at 56.509,42.075 h0.5
  text "Unmodulated Data" at 60.86,39.2 h0.5
  text "BCC RX" at 72.717,38.85 h0.5
  text "GND" at 1.65,38.266 h0.5 r270
  text "PIO1" at 56.36,36.7 h0.5
  text "Comp 2" at 76.35,29.234 h0.5 r90
  text "5V" at 0.8,26.809 h0.5 r90
  text "Comp 2 Vref" at 76.209,25.75 h0.5
  text "Unmodulated Data" at 45.218,25.525 h0.5
  text "ED Out" at 74.171,21.725 h0.5
  text "USB Face Here" at 2.85,19.776 h0.5 r90
  text "Comparator" at 53.842,19.75 h0.5
  text "Comp 1 Out" at 74.44,19 h0.5
  text "+" at 62.509,18.75 h0.5
  text "3V3 LDO" at 24.742,17.675 h0.5
  text "GND" at 2.2,17.534 h0.5 r90
  text "5V LDO" at 5.718,17.5 h0.5
  text "Comp 1" at 77.925,12.559 h0.5 r90
  text "Amp out" at 69.054,9.4 h0.5
  text "Com 1 Vref" at 75.892,8.1 h0.5
  text "BCC RX (AgCl Pad)" at 51.084,3 h0.5
  text "3V3" at 33.409,1.9 h0.5
  text "5V" at 28.334,1.875 h0.5
  text "5V Enable" at 7.168,1.8 h0.5
  text "GND" at 41.984,1.6 h0.5
  text "3V3 Enable" at 17.501,1.1 h0.5
  text "Amplifier" at 54.917,0.15 h0.5
Bottom Overlay:
  text "9V <= Vin <= 12V" at 3.85,37.363 h0.5 r270
Bottom 3D Body:
  lines w0.25: 38.65,2.7 38.675,2.7
Board Outline:
  the board outline again, w0.25

## Text inside footprints (layer, text, board x,y; h text height)
D1: Top Overlay "+" at 20.1,44.65 h0.5 r180
D2: Top Overlay "+" at 23.225,6.95 h0.5 r90
D3: Top Overlay "+" at 7.425,7.475 h0.5 r270
J1: Top Overlay "24" at 1.725,31.725 h0.5; Top Overlay "1" at 60.225,27.725 h0.5; Top Overlay "10" at 37.125,27.775 h0.5
J2: Top Overlay "24" at 1.7,16.7 h0.5; Top Overlay "1" at 60.15,12.425 h0.5; Top Overlay "10" at 37.025,12.475 h0.5
P9: Top Overlay "24" at 1.75,32.7 h0.5; Top Overlay "10" at 37.125,32.675 h0.5; Top Overlay "1" at 60.175,32.7 h0.5
P10: Top Overlay "24" at 1.7,7.575 h0.5; Top Overlay "10" at 37.025,7.45 h0.5; Top Overlay "1" at 60.175,7.425 h0.5